# EAGLE board fb_in_8_24V (EAGLE 4.16)
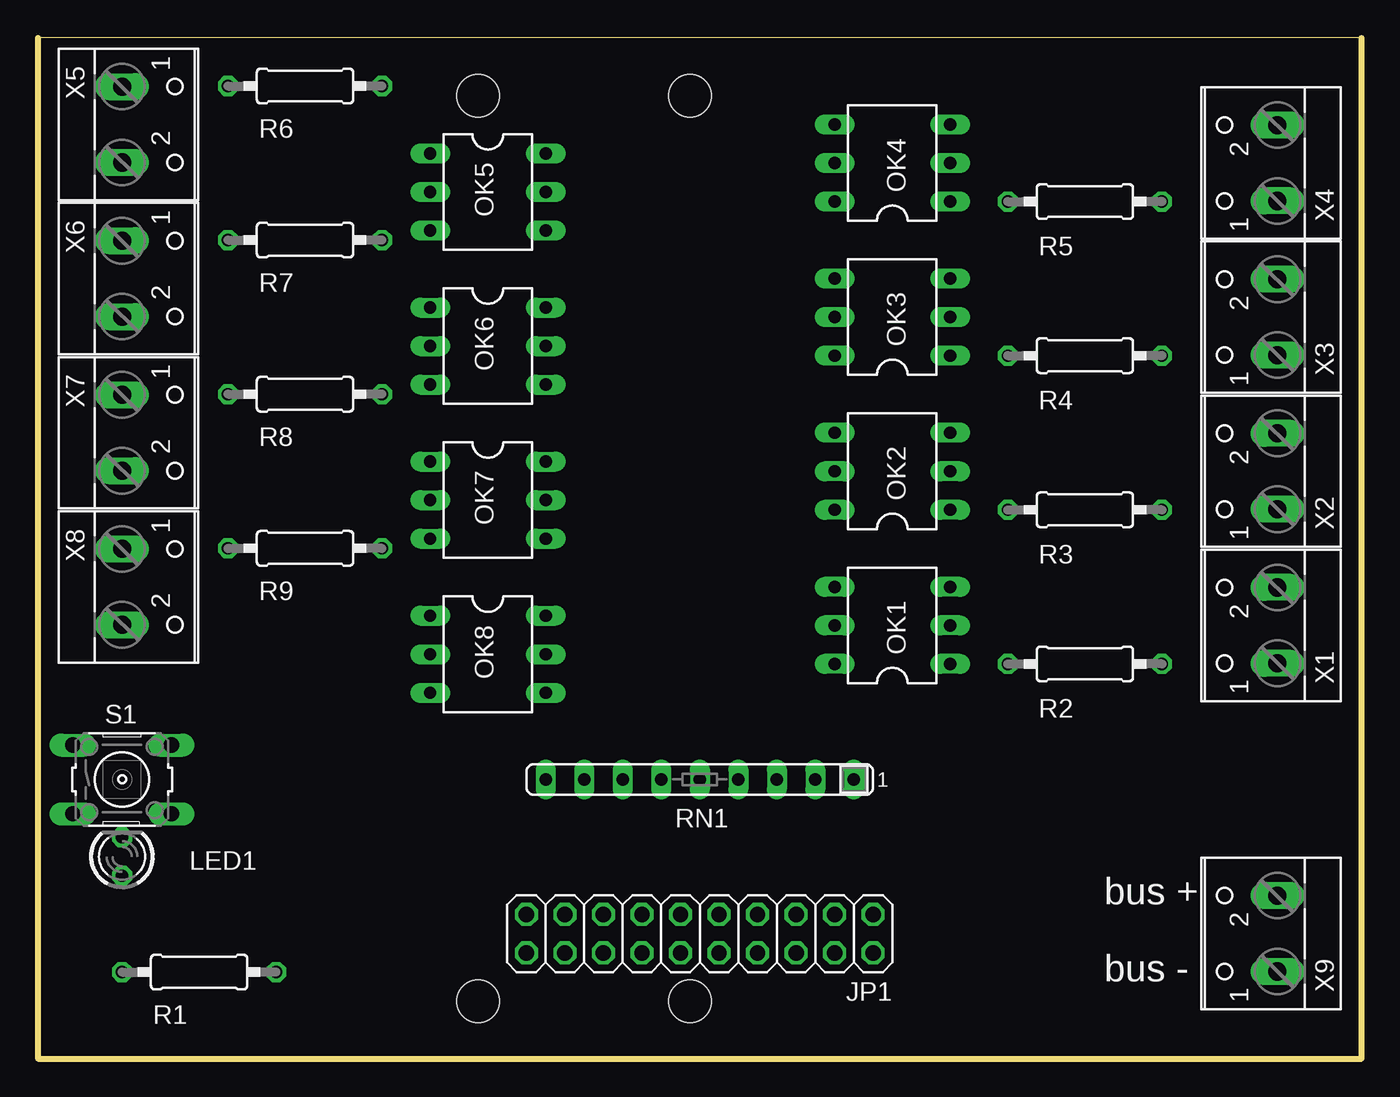
[diagram p0: board, top side]
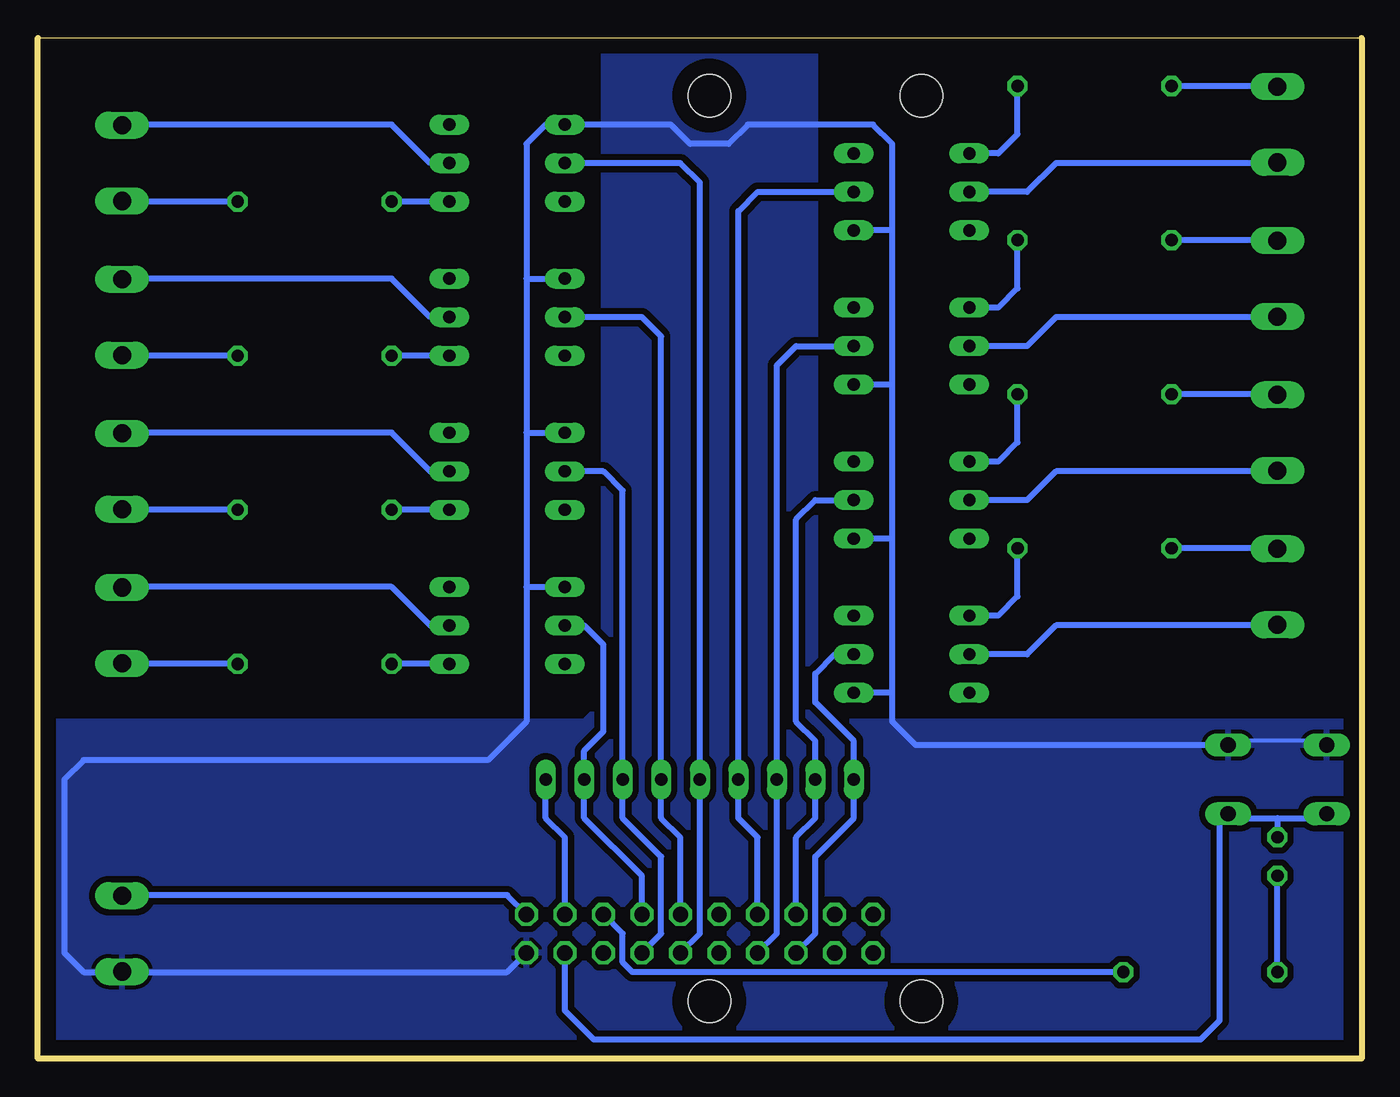
[diagram p1: board, bottom side, seen from below]

Size 87.3 x 67.3 mm. Coordinates in mm from the lower left corner, seen from the top.
Outline: 0,0 87.3,0 87.3,67.3 0,67.3 0,0
Copper layers (1*16): Top 0.035mm / dielectric 1.5mm / Bottom 0.035mm
Design rules "default": minimum track width 10mil, minimum drill 24mil, track to track 16mil, track to pad 16mil, pad to pad 16mil, via to via 16mil, smd to smd 8mil, copper to edge 40mil, drill to drill 8mil, minimum pad ring 10mil, minimum via ring 8mil, stop-mask expansion 4mil, vias tented up to drill 0mil, thermal gap 10mil
Holes 2.8 mm at 43.02,3.8 43.02,63.5 29.04,3.8 29.04,63.5

## Footprints (pad centres in the part's own frame; a part is rotated, then mirrored left to right if it is on the bottom)
2X10 = drill 1.016 octagon: 1 -11.43,-1.27; 2 -11.43,1.27; 3 -8.89,-1.27; 4 -8.89,1.27; 5 -6.35,-1.27; 6 -6.35,1.27; 7 -3.81,-1.27; 8 -3.81,1.27; 9 -1.27,-1.27; 10 -1.27,1.27; 11 1.27,-1.27; 12 1.27,1.27; 13 3.81,-1.27; 14 3.81,1.27; 15 6.35,-1.27; 16 6.35,1.27; 17 8.89,-1.27; 18 8.89,1.27; 19 11.43,-1.27; 20 11.43,1.27
LED3MM = drill 0.813 octagon: A -1.27,0; K 1.27,0
DIL06 = drill 0.813 long: 1 -2.54,-3.81; 2 0,-3.81; 3 2.54,-3.81; 4 2.54,3.81; 5 0,3.81; 6 -2.54,3.81
0207/10 = drill 0.813 octagon: 1 -5.08,0; 2 5.08,0
SIL9 = drill 0.813 long: 1 -10.16,0; 2 -7.62,0; 3 -5.08,0; 4 -2.54,0; 5 0,0; 6 2.54,0; 7 5.08,0; 8 7.62,0; 9 10.16,0
B3F-10XX = drill 1.016 long: 1 -3.251,2.261; 2 3.251,2.261; 3 -3.251,-2.261; 4 3.251,-2.261
W237-102 = drill 1.194 long: 1 -2.5,-1.27; 2 2.5,-1.27

## Placement (x,y rotation side)
JP1  [2X10]  43.65,8.25 180 top
LED1  rot  [LED3MM]  5.55,13.33 90 top
OK1  4N35  [DIL06]  56.35,28.57 90 top
OK2  4N35  [DIL06]  56.35,38.73 90 top
OK3  4N35  [DIL06]  56.35,48.89 90 top
OK4  4N35  [DIL06]  56.35,59.05 90 top
OK5  4N35  [DIL06]  29.68,57.15 270 top
OK6  4N35  [DIL06]  29.68,46.98 270 top
OK7  4N35  [DIL06]  29.68,36.83 270 top
OK8  4N35  [DIL06]  29.68,26.66 270 top
R1  1k  [0207/10]  10.63,5.71 180 top
R2  3k3  [0207/10]  69.05,26.03 0 top
R3  3k3  [0207/10]  69.05,36.19 0 top
R4  3k3  [0207/10]  69.05,46.35 0 top
R5  3k3  [0207/10]  69.05,56.51 0 top
R6  3k3  [0207/10]  17.61,64.13 180 top
R7  3k3  [0207/10]  17.61,53.97 180 top
R8  3k3  [0207/10]  17.61,43.81 180 top
R9  3k3  [0207/10]  17.61,33.65 180 top
RN1  10k  [SIL9]  43.65,18.41 180 top
S1  Programmiertaster  [B3F-10XX]  5.55,18.41 0 top
X1  [W237-102]  80.48,28.57 90 top
X2  [W237-102]  80.48,38.73 90 top
X3  [W237-102]  80.48,48.89 90 top
X4  [W237-102]  80.48,59.05 90 top
X5  [W237-102]  6.82,61.59 270 top
X6  [W237-102]  6.82,51.43 270 top
X7  [W237-102]  6.82,41.27 270 top
X8  [W237-102]  6.82,31.11 270 top
X9  [W237-102]  80.48,8.25 90 top

## Library data of the parts
JP1 = pinhead
LED1 = led
OK1-OK8 = optocoupler
R1-R9 = rcl
RN1 = resistor-sil
S1 = switch-omron
X1-X9 = con-wago-500

## Nets
GND: JP1.2 OK1.4 OK2.4 OK3.4 OK4.4 OK5.4 OK6.4 OK7.4 OK8.4 S1.1 S1.2 X9.1
IO1: JP1.7 OK1.5 RN1.2
IO2: JP1.8 OK2.5 RN1.3
IO3: JP1.9 OK3.5 RN1.4
IO4: JP1.10 OK4.5 RN1.5
IO5: JP1.13 OK5.5 RN1.6
IO6: JP1.14 OK6.5 RN1.7
IO7: JP1.15 OK7.5 RN1.8
IO8: JP1.16 OK8.5 RN1.9
N$1: R8.2 X7.1
N$2: JP1.4 LED1.K S1.3 S1.4
N$3: LED1.A R1.2
N$4: JP1.5 R1.1
N$5: JP1.1 X9.2
N$25: OK2.2 X2.2
N$26: OK1.1 R2.1
N$27: OK2.1 R3.1
N$28: OK3.1 R4.1
N$29: OK4.1 R5.1
N$30: OK5.1 R6.1
N$31: OK6.1 R7.1
N$32: OK7.1 R8.1
N$33: OK8.1 R9.1
N$34: R3.2 X2.1
N$35: OK3.2 X3.2
N$36: R4.2 X3.1
N$37: OK4.2 X4.2
N$38: R5.2 X4.1
N$39: OK5.2 X5.2
N$40: R6.2 X5.1
N$41: OK1.2 X1.2
N$42: OK6.2 X6.2
N$43: R7.2 X6.1
N$44: OK7.2 X7.2
N$46: OK8.2 X8.2
N$47: R9.2 X8.1
N$48: R2.2 X1.1
VCC: JP1.3 RN1.1

## Tracks (layer width: path | path; a pad name or v marks a point on that pad's centre or on a via)
GND
  Bottom 0.254: S1.1 3.01,20.95 8.09,20.95 S1.2
  Bottom 0.406: S1.2 29.4,20.67 30.95,22.22 30.95,24.12 | 30.95,24.12 OK8.4 | 30.95,44.45 30.95,54.61 | 30.95,44.45 OK6.4 | 30.95,34.29 30.95,44.45 | 30.95,34.29 OK7.4 | 30.95,24.12 30.95,34.29 | 30.95,54.61 OK5.4 | 30.95,54.61 30.95,60.32 32.22,61.59 40.48,61.59 41.74,60.32 44.28,60.32 45.55,61.59 OK4.4 53.81,61.59 55.08,60.32 55.08,51.43 | 55.08,51.43 OK3.4 | 55.08,51.43 55.08,41.27 | 55.08,41.27 OK2.4 | 55.08,41.27 55.08,31.11 | JP1.2 56.35,5.71 80.48,5.71 X9.1 81.75,5.71 84.29,5.71 85.56,6.98 85.56,18.41 84.29,19.68 57.62,19.68 55.08,22.22 55.08,31.11 | 55.08,31.11 OK1.4
  pour Bottom: 0.47,0.63 0.47,22.22 34.76,22.22 36.03,23.49 36.03,66.67 50,66.67 50,23.49 51.27,22.22 86.83,22.22 86.83,0.63
IO1
  Bottom 0.406: JP1.7 47.46,12.06 51.27,15.87 RN1.2 51.27,20.31 50,21.58 50,27.3 51.27,28.57 OK1.5
IO2
  Bottom 0.406: JP1.8 46.19,8.25 46.19,13.33 48.73,15.87 RN1.3 48.73,37.46 50,38.73 OK2.5
IO3
  Bottom 0.406: JP1.9 44.92,14.6 46.19,15.87 RN1.4 46.19,47.62 47.46,48.89 OK3.5
IO4
  Bottom 0.406: JP1.10 43.65,8.25 RN1.5 43.65,57.78 44.92,59.05 OK4.5
IO5
  Bottom 0.406: JP1.13 39.84,14.6 41.11,15.87 RN1.6 41.11,55.88 39.84,57.15 OK5.5
IO6
  Bottom 0.406: JP1.14 38.57,8.25 RN1.7 38.57,45.72 37.3,46.98 OK6.5
IO7
  Bottom 0.406: JP1.15 37.3,14.6 36.03,15.87 RN1.8 36.03,20.95 37.3,22.22 37.3,35.55 36.03,36.83 OK7.5
IO8
  Bottom 0.406: JP1.16 36.03,8.25 36.03,13.33 33.49,15.87 RN1.9 33.49,20.95 36.03,23.49 36.03,25.39 34.76,26.66 OK8.5
N$1
  Bottom 0.406: R8.2 6.82,43.81 X7.1
N$2
  Bottom 0.406: JP1.4 52.54,3.17 50.63,1.27 10.63,1.27 9.36,2.54 9.36,15.87 S1.4 8.09,15.87 5.55,15.87 | 5.55,15.87 3.01,15.87 S1.3 | 5.55,15.87 LED1.K
N$3
  Bottom 0.406: R1.2 LED1.A
N$4
  Bottom 0.406: JP1.5 48.73,8.25 48.73,6.34 48.09,5.71 R1.1
N$5
  Bottom 0.406: JP1.1 56.35,10.79 80.48,10.79 X9.2
N$6
  pour Bottom: 0.47,0.63 0.47,22.22 34.76,22.22 36.03,23.49 36.03,66.03 50,66.03 50,23.49 51.27,22.22 86.83,22.22 86.83,0.63
N$25
  Bottom 0.406: OK2.2 61.43,38.73 63.97,41.27 80.48,41.27 X2.2
N$26
  Bottom 0.406: OK1.1 R2.1
N$27
  Bottom 0.406: OK2.1 R3.1
N$28
  Bottom 0.406: OK3.1 R4.1
N$29
  Bottom 0.406: OK4.1 R5.1
N$30
  Bottom 0.406: R6.1 22.7,60.96 23.96,59.69 OK5.1
N$31
  Bottom 0.406: R7.1 22.7,50.8 23.96,49.53 OK6.1
N$32
  Bottom 0.406: R8.1 22.7,40.64 23.96,39.37 OK7.1
N$33
  Bottom 0.406: R9.1 22.7,30.47 23.96,29.2 OK8.1
N$34
  Bottom 0.406: R3.2 80.48,36.19 X2.1
N$35
  Bottom 0.406: OK3.2 61.43,48.89 63.97,51.43 80.48,51.43 X3.2
N$36
  Bottom 0.406: R4.2 80.48,46.35 X3.1
N$37
  Bottom 0.406: OK4.2 61.43,59.05 63.97,61.59 80.48,61.59 X4.2
N$38
  Bottom 0.406: R5.2 80.48,56.51 X4.1
N$39
  Bottom 0.406: OK5.2 22.06,57.15 20.15,59.05 6.82,59.05 X5.2
N$40
  Bottom 0.406: R6.2 6.82,64.13 X5.1
N$41
  Bottom 0.406: OK1.2 61.43,28.57 63.97,31.11 80.48,31.11 X1.2
N$42
  Bottom 0.406: OK6.2 22.06,46.98 20.15,48.89 6.82,48.89 X6.2
N$43
  Bottom 0.406: R7.2 6.82,53.97 X6.1
N$44
  Bottom 0.406: OK7.2 22.06,36.83 20.15,38.73 6.82,38.73 X7.2
N$46
  Bottom 0.406: OK8.2 22.06,26.66 20.15,28.57 6.82,28.57 X8.2
N$47
  Bottom 0.406: R9.2 6.82,33.65 X8.1
N$48
  Bottom 0.406: R2.2 80.48,26.03 X1.1
VCC
  Bottom 0.406: JP1.3 52.54,14.6 53.81,15.87 RN1.1

## Text on the board
tPlace: bus + | bus -